# Altium PCB main board_PCB.PcbDoc
Units mm, origin at the board's own origin, x right, y up, seen from the top; angles counter-clockwise.
Board outline 152.4 x 101.6 mm, 2 copper layers (Top Layer, Bottom Layer); 74 components, 62 nets, 278 pads, 63 vias.
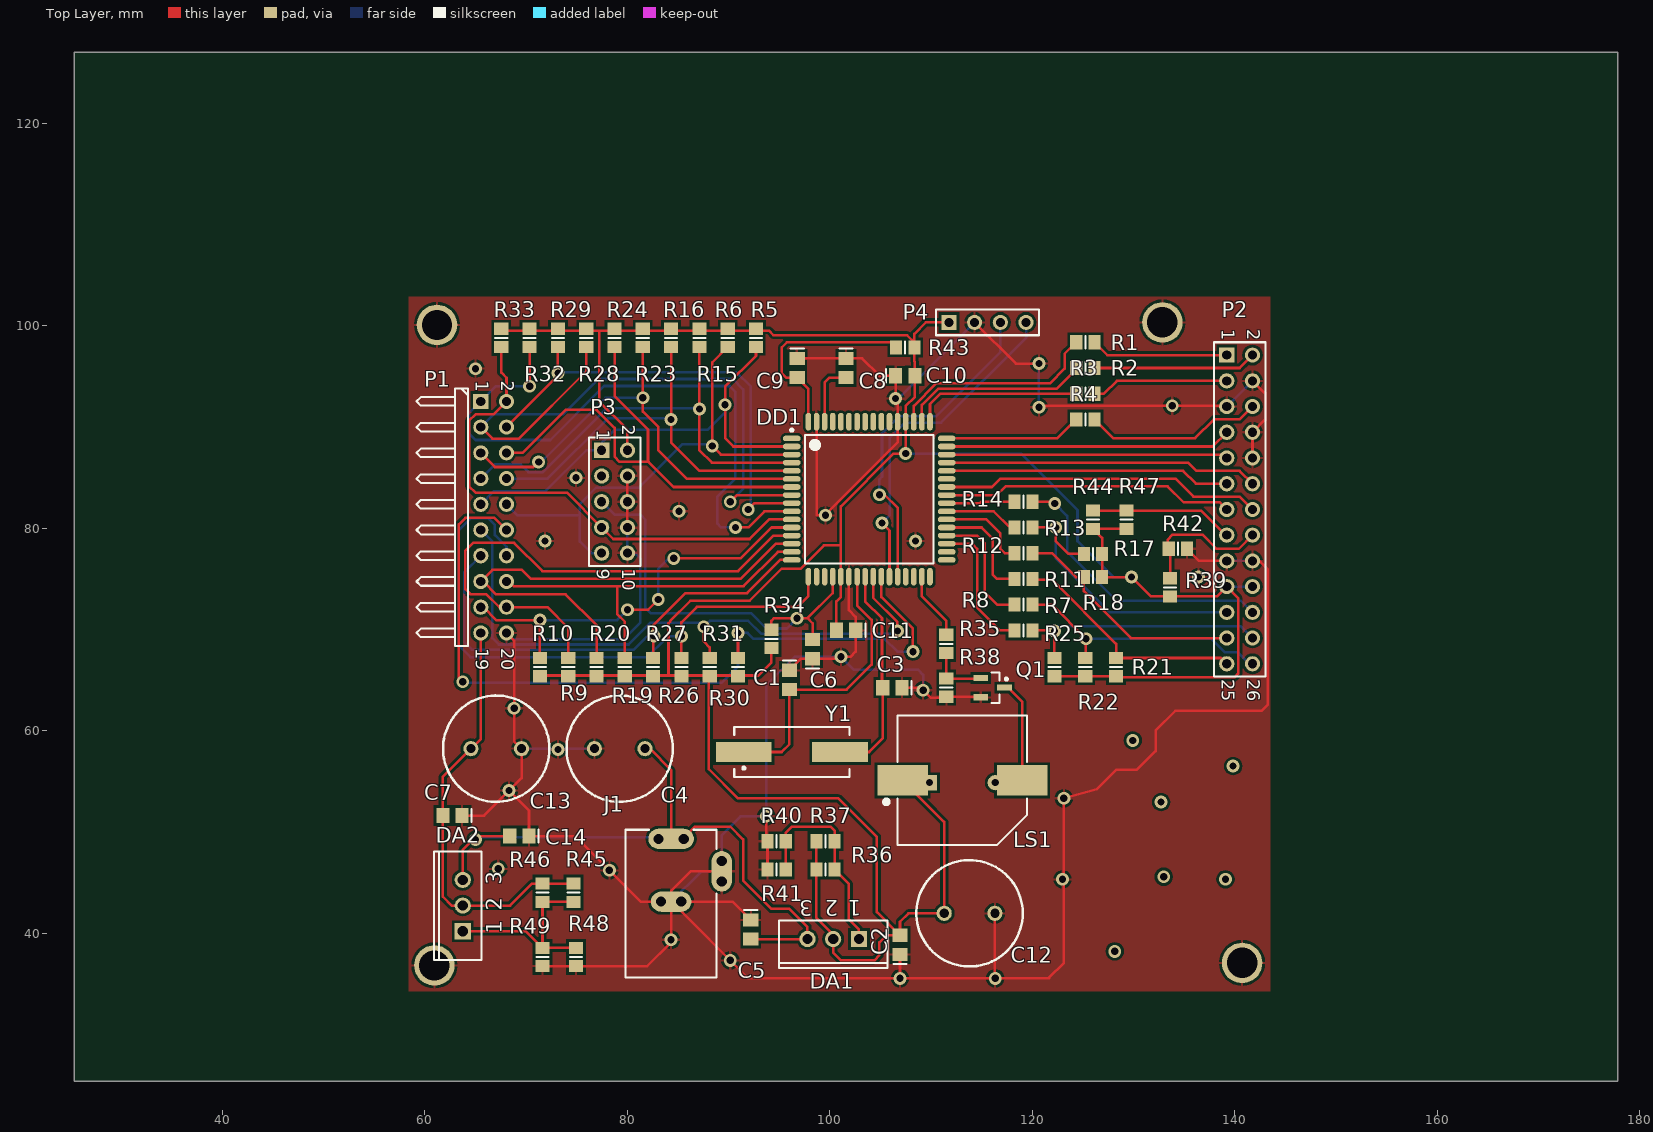
[diagram p0: Top Layer view]
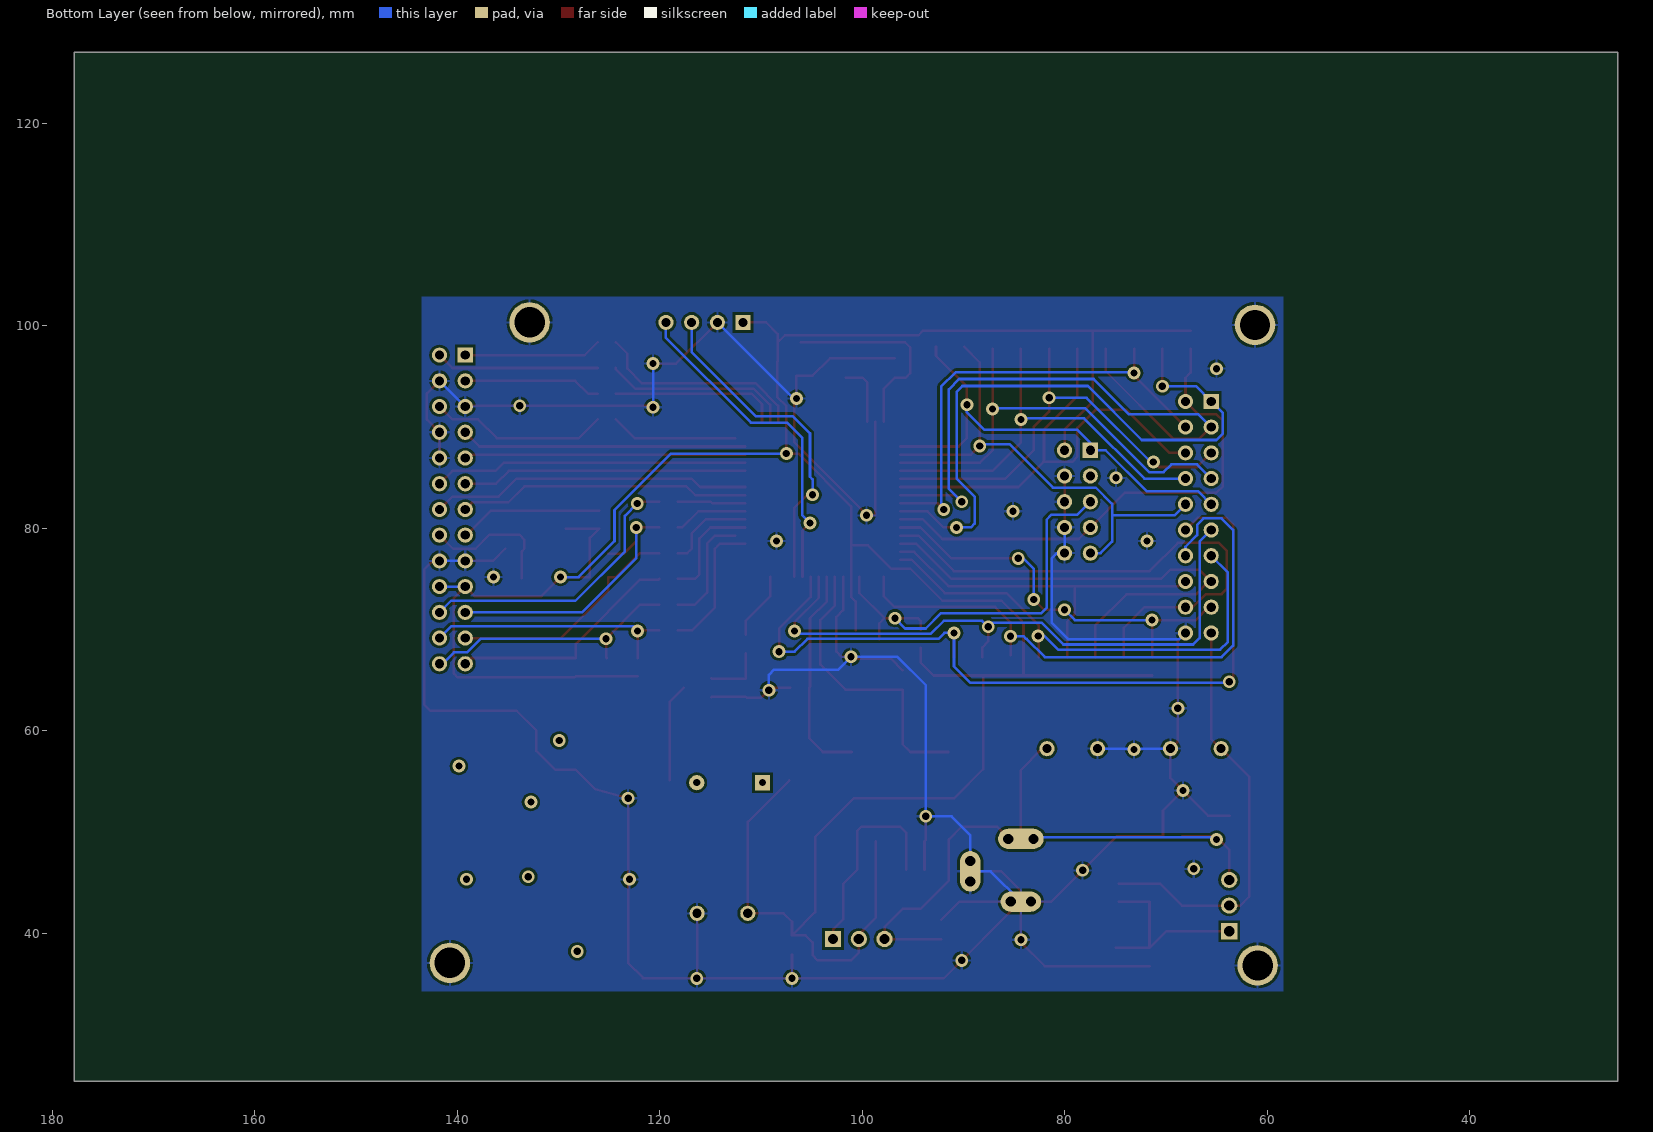
[diagram p1: Bottom Layer view, seen from below]

## Layer stack, top to bottom
Top Layer: signal copper 0.0356
Dielectric: dielectric 0.32, FR-4, Dk 4.8
Bottom Layer: signal copper 0.0356

## Board outline
25.4,25.4 177.8,25.4 177.8,127 25.4,127

## Design rules (kind name [scope] priority, off if disabled: settings)
Clearance [All] p1: gap=0.254
PolygonConnect [All] p1: connectstyle=Relief reliefconductorwidth=0.254 reliefentries=4 polygonreliefangle="90 Angle" airgapwidth=0.254
RoomDefinition "main board_CHM" [InComponentClass('main board_CHM')] p1: confinementstyle=ConfineIn formatcopy=TRUE lockcomponents=FALSE outline 57.15,33.02 144.78,33.02 144.78,104.14 57.15,104.14
RoutingVias [All] p1: holewidth=0.711 width=1.27 viastyle="Through Hole" minholewidth=0.711 minwidth=1.27 maxholewidth=0.711 maxwidth=1.27
SilkscreenOverComponentPads [All] p1: minsilkscreentomaskgap=0.254
SolderMaskExpansion [All] p1: expansion=0.102
Width [All] p1: maxlimit=0.254 minlimit=0.254 preferedwidth=0.254
27 further rules are at their usual default settings.

## Components (designator, comment, footprint, x,y, rotation, side; value= is the part's Value field where it differs from the comment)
C1 "C0805" 0805 98.298,68.072 r90 top
C2 "C0805" 0805 106.934,38.862 r90 top
C3 "C0805" 0805 106.172,64.262 r180 top
C4 "Cap Pol1" RB5-10.5 79.254,58.238 r180 top
C5 "C0805" 0805 92.202,40.386 r270 top
C6 "C0805" 0805 96.012,65.024 r270 top
C7 "C0805" 0805 62.744,51.634 r180 top
C8 "C0805" 0805 101.606,95.83 r270 top
C9 "C0805" 0805 96.78,95.83 r270 top
C10 "C0805" 0805 107.448,95.068 r0 top
C11 "C0805" 0805 101.606,69.922 r180 top
C12 "Cap Pol1" RB5-10.5 113.798,41.982 r0 top
C13 "Cap Pol1" RB5-10.5 67.062,58.238 r0 top
C14 "C0805" 0805 69.348,49.602 r180 top
DA1 "LM317KC" KC03 100.336,39.442 r180 top
DA2 "LM317KC" KC03 63.76,42.744 r90 top
DD1 "ATmega128A-AU" 64A_N 103.892,82.876 r0 top
J1 "PWR2.5" KLD-0202 84.334,35.632 r90 top
LS1 "Buzzer" ABSM-1574 107.188,55.118 r0 top
P1 "Header 10X2H" HDR2X10H 65.538,92.528 r270 top
P2 "Header 13X2" HDR2X13 139.198,97.1 r270 top
P3 "Header 5X2" HDR2X5 77.476,87.702 r270 top
P4 "Header 4" HDR1X4 111.76,100.33 r0 top
Q1 "QNPN" SOT23_M 116.078,64.262 r0 top
R1 "Res2" 6-0805_N 125.228,98.37 r180 top
R2 "Res2" 6-0805_N 125.228,95.83 r180 top
R3 "Res2" 6-0805_N 125.228,93.29 r180 top
R4 "Res2" 6-0805_N 125.228,90.75 r180 top
R5 "Res2" 6-0805_N 92.71,98.806 r90 top
R6 "Res2" 6-0805_N 89.916,98.806 r90 top
R7 "Res2" 6-0805_N 119.132,69.922 r180 top
R8 "Res2" 6-0805_N 119.132,72.462 r180 top
R9 "Res2" 6-0805_N 74.168,66.294 r270 top
R10 "Res2" 6-0805_N 71.374,66.294 r270 top
R11 "Res2" 6-0805_N 119.132,75.002 r180 top
R12 "Res2" 6-0805_N 119.132,77.542 r180 top
R13 "Res2" 6-0805_N 119.132,80.082 r180 top
R14 "Res2" 6-0805_N 119.132,82.622 r180 top
R15 "Res2" 6-0805_N 87.122,98.806 r90 top
R16 "Res2" 6-0805_N 84.328,98.806 r90 top
R17 "Res2" 6-0805_N 125.984,77.47 r0 top
R18 "Res2" 6-0805_N 125.984,75.184 r0 top
R19 "Res2" 6-0805_N 79.756,66.294 r270 top
R20 "Res2" 6-0805_N 76.962,66.294 r270 top
R21 "Res2" 6-0805_N 128.27,66.294 r270 top
R22 "Res2" 6-0805_N 125.222,66.294 r270 top
R23 "Res2" 6-0805_N 81.534,98.806 r90 top
R24 "Res2" 6-0805_N 78.74,98.806 r90 top
R25 "Res2" 6-0805_N 122.174,66.294 r270 top
R26 "Res2" 6-0805_N 85.344,66.294 r270 top
R27 "Res2" 6-0805_N 82.55,66.294 r270 top
R28 "Res2" 6-0805_N 75.946,98.806 r90 top
R29 "Res2" 6-0805_N 73.152,98.806 r90 top
R30 "Res2" 6-0805_N 90.932,66.294 r270 top
R31 "Res2" 6-0805_N 88.138,66.294 r270 top
R32 "Res2" 6-0805_N 70.358,98.806 r90 top
R33 "Res2" 6-0805_N 67.564,98.806 r90 top
R34 "Res2" 6-0805_N 94.234,69.088 r90 top
R35 "Res2" 6-0805_N 111.506,68.58 r270 top
R36 "Res2" 6-0805_N 99.574,46.3 r180 top
R37 "Res2" 6-0805_N 99.574,49.094 r180 top
R38 "Res2" 6-0805_N 111.506,64.262 r90 top
R39 "Res2" 6-0805_N 133.604,74.168 r90 top
R40 "Res2" 6-0805_N 94.748,49.094 r0 top
R41 "Res2" 6-0805_N 94.748,46.3 r0 top
R42 "Res2" 6-0805_N 134.366,77.978 r180 top
R43 "Res2" 6-0805_N 107.448,97.862 r0 top
R44 "Res2" 6-0805_N 125.99,80.844 r90 top
R45 "Res2" 6-0805_N 74.682,44.014 r90 top
R46 "Res2" 6-0805_N 71.634,44.014 r90 top
R47 "Res2" 6-0805_N 129.292,80.844 r90 top
R48 "Res2" 6-0805_N 74.936,37.664 r90 top
R49 "Res2" 6-0805_N 71.634,37.664 r90 top
Y1 "HC49/4H_SMX" HC49/4H_SMX 96.266,57.912 r0 top

## Footprints (in the part's own frame and the unit in brackets; to place one, negate y for a bottom-side part, rotate by r counter-clockwise, add the part's x,y. Pads: shape width x height; smd on the part's side, far side on the other; paste and mask are expansions set on the pad)
6-0805_N [mm] "Chip Resistor, Body 2.0x1.2mm, IPC Medium Density"
  rect 1.2x1.4 smd: 1(-0.9,0) 2(0.9,0)
  silkscreen extent 0,-0.6 0,0.6, body extent -1.07,-0.7 1.07,0.7, height 0.7
64A_N [mm] "Thin QFP, 64-Leads, Body 14x14mm, Pitch 0.8mm, IPC Medium Density"
  oval 1.75x0.55 smd: 1(-7.65,6) 2(-7.65,5.2) 3(-7.65,4.4) 4(-7.65,3.6) 5(-7.65,2.8) 6(-7.65,2) 7(-7.65,1.2) 8(-7.65,0.4) 9(-7.65,-0.4) 10(-7.65,-1.2) 11(-7.65,-2) 12(-7.65,-2.8) 13(-7.65,-3.6) 14(-7.65,-4.4) 15(-7.65,-5.2) 16(-7.65,-6) 33(7.65,-6) 34(7.65,-5.2) 35(7.65,-4.4) 36(7.65,-3.6) 37(7.65,-2.8) 38(7.65,-2) 39(7.65,-1.2) 40(7.65,-0.4) 41(7.65,0.4) 42(7.65,1.2) 43(7.65,2) 44(7.65,2.8) 45(7.65,3.6) 46(7.65,4.4) 47(7.65,5.2) 48(7.65,6)
  oval 0.55x1.75 smd: 17(-6,-7.65) 18(-5.2,-7.65) 19(-4.4,-7.65) 20(-3.6,-7.65) 21(-2.8,-7.65) 22(-2,-7.65) 23(-1.2,-7.65) 24(-0.4,-7.65) 25(0.4,-7.65) 26(1.2,-7.65) 27(2,-7.65) 28(2.8,-7.65) 29(3.6,-7.65) 30(4.4,-7.65) 31(5.2,-7.65) 32(6,-7.65) 49(6,7.65) 50(5.2,7.65) 51(4.4,7.65) 52(3.6,7.65) 53(2.8,7.65) 54(2,7.65) 55(1.2,7.65) 56(0.4,7.65) 57(-0.4,7.65) 58(-1.2,7.65) 59(-2,7.65) 60(-2.8,7.65) 61(-3.6,7.65) 62(-4.4,7.65) 63(-5.2,7.65) 64(-6,7.65)
  silkscreen extent -7.77,-6.35 6.35,6.95, body extent -7,-7 7,7, height 1.2
0805 [mm] "Chip Capacitor; Body 2.0 x 1.2 mm (LxW typ)"
  rect 1.3x1.5 smd: 1(-0.95,0) 2(0.95,0)
  silkscreen extent -1.9,-0.65 -1.9,0.65
ABSM-1574 [mm] "Magnetic Transducer Buzzer"
  rect 5x3 smd: 1(0,0) 2(11.8,0)
  rect 1.5x1.5 hole 0.7: 1A(2.65,-0.24)
  round 1.5 hole 0.7: 2A(9.15,-0.24)
  silkscreen extent -1.83,-6.4 12.3,6.4
HC49/4H_SMX [mm] "Surface Mount Quartz Crystal; Body 13.4 (inc. leads) x 4.9 mm (LxW max)"
  rect 5.5x2 smd: 1(-4.75,0) 2(4.75,0)
  silkscreen extent -5.7,-2.45 5.7,2.45
HDR1X4 [mm] "Connector; Header; 4 Position"
  rect 1.5x1.5 hole 0.9: 1(0,0)
  round 1.5 hole 0.9: 2(2.54,0) 3(5.08,0) 4(7.62,0)
  silkscreen extent -1.27,-1.27 8.89,1.27
HDR2X5 [mm] "Connector; Header; 5x2 Position"
  rect 1.5x1.5 hole 0.9: 1(0,0)
  round 1.5 hole 0.9: 2(0,2.54) 3(2.54,0) 4(2.54,2.54) 5(5.08,0) 6(5.08,2.54) 7(7.62,0) 8(7.62,2.54) 9(10.16,0) 10(10.16,2.54)
  silkscreen extent -1.27,-1.27 11.43,3.81
HDR2X10H [mm] "Connector; Header; 10x2 Position; Right Angle"
  rect 1.5x1.5 hole 0.9: 1(0,0)
  round 1.5 hole 0.9: 2(0,2.54) 3(2.54,0) 4(2.54,2.54) 5(5.08,0) 6(5.08,2.54) 7(7.62,0) 8(7.62,2.54) 9(10.16,0) 10(10.16,2.54) 11(12.7,0) 12(12.7,2.54) 13(15.24,0) 14(15.24,2.54) 15(17.78,0) 16(17.78,2.54) 17(20.32,0) 18(20.32,2.54) 19(22.86,0) 20(22.86,2.54)
  silkscreen extent -1.27,-6.35 24.13,-1.27
HDR2X13 [mm] "Connector; Header; 13x2 Position"
  rect 1.5x1.5 hole 0.9: 1(0,0)
  round 1.5 hole 0.9: 2(0,2.54) 3(2.54,0) 4(2.54,2.54) 5(5.08,0) 6(5.08,2.54) 7(7.62,0) 8(7.62,2.54) 9(10.16,0) 10(10.16,2.54) 11(12.7,0) 12(12.7,2.54) 13(15.24,0) 14(15.24,2.54) 15(17.78,0) 16(17.78,2.54) 17(20.32,0) 18(20.32,2.54) 19(22.86,0) 20(22.86,2.54) 21(25.4,0) 22(25.4,2.54) 23(27.94,0) 24(27.94,2.54) 25(30.48,0) 26(30.48,2.54)
  silkscreen extent -1.27,-1.27 31.75,3.81
KC03 [mm] "TO, Thru-Hole, Vertical, Heatsink Mounted; 3 In-Line Leads; Pitch 2.54 mm"
  rect 1.6x1.6 hole 1: 1(-2.54,0)
  round 1.6 hole 1: 2(0,0) 3(2.54,0)
  silkscreen extent -5.35,-1.85 5.35,2.85
KLD-0202 [mm] "DC Power Jack, 2.5mm, KLD Series, PCB Mount"
  oval 2x4.5 all layers, no hole: 1(13.7,0)
  round 1.5 hole 1: 1A(13.7,-1.25) 1B(13.7,1.25) 2A(7.5,-1) 2B(7.5,1) 3A(9.5,-5) 3B(11.5,-5)
  oval 2x4 all layers, no hole: 2(7.5,0)
  oval 4x2 all layers, no hole: 3(10.5,-5)
  silkscreen extent 0,-4.5 14.6,4.5
RB5-10.5 [mm] "Capacitor (Radial); 2 Leads"
  round 1.5 hole 0.9: 1(-2.5,0) 2(2.5,0)
  silkscreen extent -5.25,-5.25 5.25,5.25
SOT23_M [mm] "SOT23, 3-Leads, Body 2.9x1.3mm, Pitch 0.95mm, Lead Span 2.3mm - Reverse Pinning, IPC Low Density"
  rect 1.45x0.6 smd: 1(1.175,0) 2(-1.175,-0.95) 3(-1.175,0.95)
  silkscreen extent -0.1,-1.5 1.48,1.5, body extent -0.7,-1.5 0.7,1.5, height 1.1

## Part data
C1 C2 C3 C5 C6 C7 C8 C9 C10 C11 C14: "Ceramic Chip Capacitor - Standard"
C4 C12 C13: "Polarized Capacitor (Radial)"
DA1 DA2: "3-Terminal Adjustable Regulator"
DD1: "8-bit AVR Microcontroller, 128KB Flash, 4KB EEPROM, 4KB SRAM, 64-pin TQFP, Industrial Grade (-40°C to 85°C)"
J1: "Low Voltage Power Supply Connector"
LS1: "Magnetic Transducer Buzzer"
P1: "Header, 10-Pin, Dual row, Right Angle"
P2: "Header, 13-Pin, Dual row"
P3: "Header, 5-Pin, Dual row"
P4: "Header, 4-Pin"
Q1: "NPN Bipolar Transistor"
R1 R2 R3 R4 R5 R6 R7 R8 R9 R10 R11 R12 R13 R14 R15 R16 R17 R18 R19 R20 R21 R22 R23 R24 R25 R26 R27 R28 R29 R30 R31 R32 R33 R34 R35 R36 R37 R38 R39 R40 R41 R42 R43 R44 R45 R46 R47 R48 R49: "Resistor"
Y1: "Surface Mount Quartz Crystal"

## Free pads (board coordinates)
  round 4 hole 3: 0(60.96,36.83) 0(61.214,100.076) 0(132.842,100.33) 0(140.716,37.084)

## Via types
v1: diameter 1.27, hole 0.711, Top Layer to Bottom Layer, 63 vias

## Nets (pads, with @x,y where several pads share a name; then routed paths per layer and width w, separated by ;. In a path a pad name is that pad's centre, name@x,y a point inside that pad or via, vN(x,y) a via of type N, cw(c..) or ccw(c..) an arc to the next point about the centre after c; other vN are vias at no path point)
AREF: C8.2 DD1.62 | length 6.2
  Top Layer w0.254: DD1.62 99.492,94.412 99.96,94.88 C8.2
AVCC: C9.2 DD1.64 R43.1 | length 20.1
  Top Layer w0.254: DD1.64 97.892,93.768 C9.2 95.698,94.88 95.256,95.322 95.256,97.862 95.764,98.37 R43.1@106.04,98.37
B_LIG: P2.15 R44.2 R47.2 | length 14.2
  Top Layer w0.254: R44.2 R47.2 136.652,81.744 139.076,79.32 P2.15
BEEP_ON: DD1.31 R35.1 | length 6.7
  Top Layer w0.254: DD1.31 109.092,73.28 111.506,70.866 R35.1
BUT1: P2.21 R13.1 R17.1 | length 29
  Top Layer w0.254: R13.1 v1(122.307,80.082) 122.307,78.74 123.577,77.47 R17.1
  Bottom Layer w0.254: v1(122.307,80.082) 122.307,77.083 127.69,71.7 P2.21
BUT2: P2.23 R12.1 R18.1 | length 23.4
  Top Layer w0.254: R12.1 121.932,77.542 124.29,75.184 R18.1 125.084,73.798 129.722,69.16 P2.23
BUT3: P2.25 R11.1 R21.1 | length 23.5
  Top Layer w0.254: R11.1 120.104,74.93 121.926,74.93 128.27,68.586 R21.1 138.624,67.194 P2.25
BUT4: P2.26 R8.1 R22.1 | length 26
  Top Layer w0.254: R8.1 121.92,72.462 v1(125.294,69.088) 125.294,67.266 R22.1
  Bottom Layer w0.254: v1(125.294,69.088) 137.671,69.088 139.008,67.751 140.329,67.751 141.46,66.62 P2.26
BUT5: P2.24 R7.1 R25.1 | length 25.1
  Top Layer w0.254: R7.1 122.102,69.922 v1(122.174,69.85) R25.1
  Bottom Layer w0.254: v1(122.174,69.85) 122.652,70.328 140.57,70.328 P2.24
CONTR: P2.16 R39.2 R42.2 | length 13.7
  Top Layer w0.254: R39.2 133.604,77.724 133.35,77.978 133.35,78.856 133.858,79.364 136.79,79.364 138.176,77.978 140.396,77.978 P2.16
  Bottom Layer w0.254: P2.16@141.738,79.254 P2.16
D4: DD1.41 P2.13 | length 29
  Top Layer w0.254: DD1.41 116.484,83.276 117.354,84.146 133.356,84.146 134.952,82.55 138.508,82.55 P2.13
D5: DD1.42 P2.14 | length 31.8
  Top Layer w0.254: DD1.42 116.014,84.076 116.846,84.908 134.118,84.908 135.896,83.13 140.468,83.13 P2.14
D6: DD1.44 P2.11 | length 28.2
  Top Layer w0.254: DD1.44 134.874,85.676 136.15,84.4 P2.11
D7: DD1.45 P2.12 | length 31.1
  Top Layer w0.254: DD1.45 135.388,86.476 136.194,85.67 140.468,85.67 P2.12
E: DD1.47 P2.7 | length 28.2
  Top Layer w0.254: DD1.47 137.794,88.076 P2.7
GND: C1.1 C2.1 C3.1 C4.2 C5.1 C6.1 C7.1 C8.1 C9.1 C10.1 C11.1 C12.2 C13.2 C14.1 DD1.22 DD1.53 DD1.63 J1.2 J1.2A J1.2B J1.3 J1.3A J1.3B P1.20 P2.4 P2.5 P2.8 P2.10 P2.17 P2.18 P3.4 P3.6 P3.8 P3.10 P4.2 pad.0 Q1.2 R38.1 R40.1 R41.1 R42.1 R48.1 R49.1 | length 399.1
  Top Layer w0.254: C7.1 65.858,51.634 v1(68.326,54.102) ; P1.20 68.84,68.906 68.84,58.96 C13.2 69.562,55.338 v1(68.326,54.102) ; R49.1 R48.1 81.976,36.764 84.328,39.116 v1(84.328,39.37) J1.2@84.328,43.126 ; P3.8 P3.6 P3.4 ; J1.2B 81.328,43.132 74.858,49.602 C14.1 70.298,52.13 v1(68.326,54.102) ; J1.2 84.376,43.132 J1.2@84.382,43.126 ; J1.3A J1.3 ; J1.3B J1.3 ; C5.1 90.412,43.126 J1.2@84.382,43.126 ; v1(93.726,51.562) 93.726,49.216 R40.1 R41.1 ; C6.1 97.16,67.122 C1.1 100.904,67.122 v1(101.092,67.31) 102.048,67.31 102.556,67.818 C11.1 102.556,71.258 101.892,71.922 DD1.22 ; C9.1 C8.1 103.181,96.78 104.893,95.068 C10.1 v1@106.498,92.874 ; DD1.63 98.692,81.28 v1(99.568,81.28) 99.568,81.367 106.692,88.491 DD1.53 106.692,92.68 v1@106.498,92.874 ; v1(106.483,92.807) 106.498,92.823 v1@106.498,92.874 ; C2.1 v1(106.934,35.56) ; C3.1 108.966,64.262 v1(109.22,64.008) 109.982,63.246 111.39,63.246 R38.1 114.853,63.362 Q1.2 ; P4.2 118.364,96.266 v1(120.65,96.266) ; C12.2 116.298,35.594 v1(116.332,35.56) ; v1(120.65,91.948) 120.799,92.097 v1(133.812,92.097) 139.121,92.097 P2.5 ; R42.1 136.464,76.78 P2.17 ; P2.18 142.422,76.78 143.256,75.946 143.256,62.622 142.61,61.976 134.112,61.976 132.173,60.037 132.173,58.005 130.327,56.159 128.295,56.159 126.356,54.22 v1(123.11,53.34) 123.11,37.084 121.666,35.64 121.666,35.56 v1(116.332,35.56) ; P2.10 P2.8 142.983,90.725 142.983,93.315 P2.4 ; J1.2@84.328,43.126 84.328,44.196 86.264,46.132 J1.3 ; J1.2@84.328,43.126 J1.2@84.382,43.126 ; J1.2@84.382,43.126 91.948,35.56 v1(106.934,35.56) ; v1(106.934,35.56) v1(116.332,35.56)
  Bottom Layer w0.254: P1.20 68.713,69.033 79.635,69.033 81.286,70.684 81.286,77.034 80.778,77.542 P3.10 P3.8 ; C13.2 C4.2 ; J1.2B J1.2 87.334,46.132 J1.3 ; J1.3A J1.3 ; v1(106.483,92.807) 106.777,92.807 P4.2 ; v1(109.22,64.008) 109.22,65.532 108.712,66.04 102.362,66.04 v1(101.092,67.31) 96.52,67.31 93.726,64.516 v1(93.726,51.562) 91.186,51.562 89.334,49.71 J1.3B J1.3 ; v1(120.65,91.948) v1(120.65,96.266) ; P2.17 P2.18 ; P2.5 P2.4
  other v1: 90.17,37.338 122.983,45.339 78.232,46.228 67.264,46.377 73.152,58.166 68.834,62.23 136.398,75.184 71.882,78.74 108.458,78.74 85.096,81.682 74.936,84.984 65.024,95.758
LD1: P2.22 R14.1 | length 28.3
  Top Layer w0.254: R14.1 122.053,82.622 v1(122.216,82.459)
  Bottom Layer w0.254: v1(122.216,82.459) 123.444,81.231 123.444,77.724 128.325,72.843 140.595,72.843 P2.22
LD2: P2.6 R4.1 | length 17.7
  Top Layer w0.254: R4.1 127.978,88.9 136.072,88.9 137.922,90.75 140.468,90.75 P2.6
LD3: P2.3 R3.1 | length 13.6
  Top Layer w0.254: R3.1 127.072,93.29 128.342,94.56 P2.3
LD4: P2.2 R2.1 | length 16.1
  Top Layer w0.254: R2.1 140.468,95.83 P2.2
LD5: P2.1 R1.1 | length 13.6
  Top Layer w0.254: R1.1 127.398,97.1 P2.1
NetC4_1: C4.1 C5.2 C14.2 DA1.3 DA2.3 J1.1 J1.1A J1.1B | length 65.1
  Top Layer w0.254: DA2.3 63.76,48.266 64.77,49.276 v1(65.024,49.276) 65.35,49.602 C14.2 ; C4.1 82.224,58.238 84.334,56.128 J1.1 ; J1.1A 85.584,49.45 86.68,50.546 90.17,50.546 91.44,49.276 91.44,45.212 94.234,42.418 96.012,42.418 97.79,40.64 97.79,39.436 C5.2
  Bottom Layer w0.254: v1@65.024,49.497 82.919,49.497 J1.1B J1.1 J1.1A
NetDA1_1: DA1.1 R36.1 R37.1 R40.2 R41.2 | length 20.6
  Top Layer w0.254: R41.2 R40.2 95.648,49.928 96.266,50.546 100.076,50.546 100.474,50.148 R37.1 R36.1 101.854,44.92 101.854,41.402 102.876,40.38 DA1.1
NetDA2_1: DA2.1 R45.1 R46.1 R48.2 R49.2 | length 19.5
  Top Layer w0.254: DA2.1 69.994,40.204 R49.2 ; R45.1 R46.1 R49.2 ; R48.2 R49.2
NetDD1_35: DD1.35 R7.2 | length 13.6
  Top Layer w0.254: DD1.35 114.056,78.476 114.554,77.978 114.554,72.189 116.821,69.922 R7.2
NetDD1_36: DD1.36 R8.2 | length 11.4
  Top Layer w0.254: 112.522,79.276 114.526,79.276 115.316,78.486 115.316,73.66 116.514,72.462 R8.2
NetDD1_37: DD1.37 R11.2 | length 10.9
  Top Layer w0.254: DD1.37 114.996,80.076 116.078,78.994 116.078,75.438 116.514,75.002 R11.2
NetDD1_38: DD1.38 R12.2 | length 9
  Top Layer w0.254: DD1.38 115.466,80.876 116.849,79.493 116.849,77.969 117.276,77.542 R12.2
NetDD1_39: DD1.39 R13.2 | length 7.4
  Top Layer w0.254: DD1.39 116.19,81.676 117.784,80.082 R13.2
NetDD1_40: DD1.40 R14.2 | length 6.8
  Top Layer w0.254: DD1.40 114.814,82.476 114.96,82.622 R14.2
NetDD1_48: DD1.48 R4.2 | length 12.6
  Top Layer w0.254: 112.522,88.876 122.454,88.876 R4.2
NetDD1_49: DD1.49 R3.2 | length 16.6
  Top Layer w0.254: DD1.49 109.892,92.259 110.923,93.29 R3.2
NetDD1_50: DD1.50 R2.2 | length 18.5
  Top Layer w0.254: DD1.50 109.092,92.178 110.712,93.798 122.428,93.798 124.328,95.698 R2.2
NetDD1_51: DD1.51 R1.2 | length 21.1
  Top Layer w0.254: DD1.51 108.292,92.096 110.502,94.306 121.738,94.306 123.19,95.758 123.19,97.232 R1.2
NetLS1_2: LS1.2 LS1.2A Q1.1 | length 9.7
  Top Layer w0.254: Q1.1@117.602,64.262 118.988,62.876 LS1.2
NetQ1_2: Q1.3 R35.2 R38.2 | length 5.9
  Top Layer w0.254: R35.2 R38.2 114.853,65.162 Q1.3
PDI: DD1.2 P1.9 P3.1 R5.1 | length 46.2
  Top Layer w0.254: R5.1 92.71,97.028 89.662,93.98 v1(89.662,92.202) 89.662,88.9 90.486,88.076 DD1.2
  Bottom Layer w0.254: P1.9 66.808,83.638 71.888,83.638 75.952,87.702 P3.1 77.476,88.398 78.812,89.734 87.956,89.734 89.662,91.44 v1(89.662,92.202)
PDO: DD1.3 P1.10 P3.9 R6.1 | length 48.2
  Top Layer w0.254: R6.1 88.392,96.382 v1(88.392,88.138) 89.254,87.276 DD1.3
  Bottom Layer w0.254: P1.10 69.166,81.28 75.317,81.28 ; P3.9 76.46,77.542 75.317,78.685 75.317,81.28 ; v1(88.392,88.138) 88.244,88.286 85.426,88.286 81.159,84.019 76.94,84.019 75.317,82.395 75.317,81.28
RES: C1.2 DD1.20 P3.5 R34.2 | length 42
  Top Layer w0.254: R34.2 94.234,70.866 94.488,71.12 v1(96.774,71.12) 97.8,71.12 ; C1.2 98.298,70.622 97.8,71.12 ; DD1.20 100.292,73.612 97.8,71.12
  Bottom Layer w0.254: P3.5 78.746,81.352 81.286,81.352 81.794,80.844 81.794,72.136 82.302,71.628 92.202,71.628 93.726,70.104 95.758,70.104 v1(96.774,71.12)
RS: DD1.46 P2.9 | length 27.8
  Top Layer w0.254: DD1.46 138.862,87.276 P2.9
RXD1: DD1.27 P4.4 | length 33.4
  Top Layer w0.254: v1(105.156,80.518) 105.892,79.782 DD1.27
  Bottom Layer w0.254: v1(105.156,80.518) 105.918,81.28 105.918,88.9 107.442,90.424 110.998,90.424 119.38,98.806 P4.4
SCK: DD1.11 P1.2 P3.7 R33.1 | length 51.2
  Top Layer w0.254: R33.1@67.57,97.724 67.57,95.373 68.078,94.865 P1.2 66.808,91.258 65.03,91.258 64.395,90.623 64.395,84.146 65.03,83.511 74.047,83.511 P3.7 78.619,78.939 92.081,78.939 94.018,80.876 DD1.11
SENS_3: DD1.4 P1.7 R15.1 | length 44.7
  Top Layer w0.254: R15.1@87.128,97.724 v1(87.128,91.766) 87.128,87.702 88.354,86.476 DD1.4
  Bottom Layer w0.254: P1.7 66.935,86.305 69.463,86.305 70.23,85.538 71.634,85.538 71.639,85.543 71.674,85.543 77.998,91.868 v1@87.026,91.868
SENS_4: DD1.5 P1.8 R16.1 | length 40.9
  Top Layer w0.254: R16.1@84.334,97.724 v1(84.334,90.75) 84.334,88.47 87.128,85.676 DD1.5
  Bottom Layer w0.254: P1.8 72.142,84.908 78.086,90.852 v1@84.232,90.852
SENS_5: DD1.6 P1.5 R23.1 | length 44.4
  Top Layer w0.254: P1.5 66.935,86.051 70.745,86.051 v1(71.253,86.559) ; R23.1@81.54,97.724 v1(81.54,92.884) 81.54,91.512 83.064,89.988 83.064,87.702 85.89,84.876 DD1.6
  Bottom Layer w0.254: v1(71.253,86.559) 71.507,86.559 77.832,92.884 v1(81.54,92.884)
SENS_6: DD1.7 P1.6 R24.1 | length 47.3
  Top Layer w0.254: P1.6 69.668,87.448 73.914,91.694 76.962,91.694 78.746,89.91 78.746,87.067 79.254,86.559 82.048,86.559 ; R24.1@78.746,97.724 78.746,93.048 82.048,89.746 82.048,86.559 ; DD1.7 84.588,84.076 82.105,86.559 82.048,86.559
SENS_7: DD1.8 P1.3 R28.1 | length 62.1
  Top Layer w0.254: P1.3 66.681,88.845 69.293,88.845 75.952,95.504 R28.1@75.952,97.724 ; v1(90.176,82.622) 90.83,83.276 DD1.8
  Bottom Layer w0.254: P1.3 66.808,91.258 73.666,91.258 77.15,94.742 90.424,94.742 91.44,93.726 91.44,83.886 v1(90.176,82.622)
SENS_8: DD1.9 P1.4 R29.1 | length 46.3
  Top Layer w0.254: P1.4 73.158,95.068 v1(73.158,95.347) R29.1@73.158,97.724 ; v1(91.954,81.86) 92.57,82.476 DD1.9
  Bottom Layer w0.254: v1(73.158,95.347) 73.209,95.398 90.784,95.398 92.202,93.98 92.202,82.108 v1(91.954,81.86)
SENS_9: DD1.10 P1.1 R32.1 | length 63.7
  Top Layer w0.254: v1(70.364,94.027) R32.1@70.364,97.724 ; v1(90.684,80.082) 91.954,80.082 93.548,81.676 DD1.10
  Bottom Layer w0.254: v1(70.364,94.027) 67.037,94.027 P1.1 64.395,91.385 64.395,89.353 65.03,88.718 72.396,88.718 77.724,94.046 90.104,94.046 90.678,93.472 90.678,84.902 88.9,83.124 88.9,80.462 89.28,80.082 v1(90.684,80.082)
SENS_11: DD1.12 P1.17 R10.1 | length 40.5
  Top Layer w0.254: P1.17 65.792,72.208 67.062,70.938 v1(71.38,70.938) R10.1@71.38,67.266 ; v1(80.016,71.954) 82.048,71.954 v1(83.064,72.97) ; v1(84.588,77.034) 91.204,77.034 94.246,80.076 DD1.12
  Bottom Layer w0.254: v1(71.38,70.938) 79,70.938 v1(80.016,71.954) ; v1(83.064,72.97) 83.064,76.018 84.08,77.034 v1(84.588,77.034)
SENS_12: DD1.13 P1.18 R9.1 | length 53.6
  Top Layer w0.254: R9.1@74.174,67.266 74.174,70.176 72.142,72.208 P1.18 67.36,72.208 66.068,73.5 64.5,73.5 64.014,73.986 64.014,77.796 64.776,78.558 68.84,78.558 71.634,75.764 90.938,75.764 94.45,79.276 DD1.13
SENS_13: DD1.14 P1.15 R20.1 | length 49.4
  Top Layer w0.254: R20.1@76.968,67.266 76.968,70.43 73.92,73.478 67.062,73.478 65.792,74.748 P1.15 66.681,75.891 69.602,75.891 70.491,75.002 91.192,75.002 94.666,78.476 DD1.14
SENS_14: DD1.15 P1.16 R19.1 | length 36.8
  Top Layer w0.254: P1.16@68.332,74.748 68.789,74.291 79,74.291 ; R19.1@79.762,67.266 79.762,70.771 79,71.533 79,74.291 ; DD1.15 94.882,77.676 91.497,74.291 79,74.291
SENS_15: DD1.16 P1.13 R27.1 | length 47.7
  Top Layer w0.254: R27.1@82.556,67.266 82.556,70.392 85.769,73.605 91.827,73.605 95.098,76.876 DD1.16
  Bottom Layer w0.254: P1.13 63.899,75.649 63.899,68.767 64.649,68.017 80.651,68.017 v1@82.012,69.378
  other v1: 82.625,69.378
SENS_16: DD1.17 P1.14 R26.1 | length 61.3
  Top Layer w0.254: R26.1@85.344,67.448 v1(85.344,69.342) 85.35,69.348 85.35,70.709 86.874,72.233 96.805,72.233 97.892,73.32 DD1.17
  Bottom Layer w0.254: P1.14 68.078,78.177 66.935,79.32 66.935,80.336 66.3,80.971 64.522,80.971 63.379,79.828 63.379,68.423 64.522,67.28 81.964,67.28 83.772,69.088 83.82,69.088 84.074,69.342 v1(85.344,69.342)
SENS_17: DD1.25 P1.11 R31.1 | length 63
  Top Layer w0.254: v1(87.56,70.278) 87.56,68.83 88.144,68.246 R31.1@88.144,67.266 ; DD1.25 104.292,73.129 106.68,70.741 v1(106.68,69.85)
  Bottom Layer w0.254: P1.11 66.681,78.685 66.681,69.16 67.316,68.525 80.143,68.525 82.302,70.684 87.153,70.684 v1(87.56,70.278) 88.148,70.866 91.948,70.866 93.218,69.596 106.426,69.596 v1(106.68,69.85)
SENS_18: DD1.26 P1.12 R30.1 | length 81.5
  Top Layer w0.254: v1(63.76,64.842) 63.379,65.223 63.379,80.387 64.014,81.022 66.884,81.022 P1.12 ; R30.1@90.938,67.266 v1(90.938,69.668) ; DD1.26 105.092,73.216 108.204,70.104 v1(108.204,67.818)
  Bottom Layer w0.254: v1(63.76,64.842) 63.836,64.766 89.338,64.766 90.938,66.366 v1(90.938,69.668) 91.876,69.668 92.456,69.088 105.41,69.088 106.68,67.818 v1(108.204,67.818)
TXD1: DD1.28 P4.3 | length 33.2
  Top Layer w0.254: v1(104.902,83.312) 105.41,83.312 106.692,82.03 DD1.28
  Bottom Layer w0.254: v1(104.902,83.312) 104.902,84.836 105.156,85.09 105.156,89.367 106.841,91.052 110.49,91.052 116.84,97.402 P4.3
VCC: C2.2 C10.2 C11.2 C12.1 DA1.2 DD1.21 DD1.52 LS1.1 LS1.1A P2.19 P2.20 P3.2 P4.1 R5.2 R6.2 R9.2 R10.2 R15.2 R16.2 R17.2 R18.2 R19.2 R20.2 R21.2 R22.2 R23.2 R24.2 R25.2 R26.2 R27.2 R28.2 R29.2 R30.2 R31.2 R32.2 R33.2 R34.1 R36.2 R37.2 R39.1 R43.2 R44.1 R47.1 | length 303.1
  Top Layer w0.254: R33.2@67.57,99.524 77.222,99.524 ; R10.2@71.38,65.466 84.074,65.466 ; P3.2 80.016,89.734 77.222,92.528 77.222,99.524 ; R31.2@88.144,65.466 92.945,65.466 94.234,66.755 R34.1 ; R37.2 R36.2 98.674,41.534 100.336,39.872 DA1.2 DA1.2@100.336,39.34 ; DA1.2@100.284,39.393 100.285,39.391 DA1.2@100.336,39.34 ; C11.2 100.656,72.788 101.092,73.224 DD1.21 101.092,78.304 ; LS1.1 111.298,51.008 C12.1 107.768,41.982 106.934,41.148 C2.2 ; P4.1 109.474,100.33 108.348,99.204 R43.2@108.348,98.343 ; R25.2 R22.2 R21.2 128.386,65.278 139.954,65.278 140.329,65.653 140.329,73.109 P2.19 138.226,73.268 R39.1 131.71,73.268 v1(129.794,75.184) R18.2 R17.2 126.884,79.05 R44.1 R47.1 ; 77.222,99.524 92.716,99.524 93.98,99.524 94.444,99.06 107.631,99.06 R43.2@108.348,98.343 ; 84.074,65.466 84.074,70.612 84.232,70.77 84.232,70.836 86.239,72.843 92.081,72.843 95.256,76.018 97.136,76.018 99.422,78.304 101.092,78.304 ; 84.074,65.466 88.066,65.466 88.066,56.206 90.932,53.34 100.838,53.34 104.648,49.53 104.648,42.098 C2.2 ; DA1.2@100.336,39.34 100.336,38.094 101.092,37.338 104.394,37.338 104.902,37.846 104.902,39.116 105.598,39.812 C2.2 ; 101.092,78.304 101.092,82.173 106.295,87.376 v1(107.492,87.376) DD1.52 107.492,92.071 108.398,92.977 C10.2 108.398,96.44 108.348,96.49 R43.2 R43.2@108.348,98.343
  Bottom Layer w0.254: v1(107.492,87.376) 118.872,87.376 124.46,81.788 124.46,78.74 128.016,75.184 v1(129.794,75.184) ; P2.19 P2.20
VCC_2: C7.2 C13.1 DA2.2 P1.19 R45.2 R46.2 | length 41.8
  Top Layer w0.254: P1.19 65.538,59.214 C13.1 61.794,55.47 C7.2 61.794,43.616 62.666,42.744 DA2.2 68.434,42.744 70.604,44.914 R46.2 R45.2
XTL1: C3.2 DD1.24 Y1.2 | length 21.4
  Top Layer w0.254: Y1.2 103.886,57.912 105.222,59.248 C3.2 ; DD1.24 103.492,72.784 105.156,71.12 C3.2@105.156,64.328
XTL2: C6.2 DD1.23 Y1.1 | length 28.6
  Top Layer w0.254: Y1.1 95.25,57.912 96.012,58.674 C6.2 101.666,64.074 104.14,66.548 104.14,70.944 102.692,72.392 DD1.23
pads on no net: DD1.1 DD1.18 DD1.19 DD1.29 DD1.30 DD1.32 DD1.33 DD1.34 DD1.43 DD1.54 DD1.55 DD1.56 DD1.57 DD1.58 DD1.59 DD1.60 DD1.61 P3.3
copper on no net:
  other v1: 128.143,38.227 139.065,45.339 132.969,45.593 132.715,52.959 139.827,56.515 129.921,59.055

## Polygon pours and split planes (outlines as drawn)
GND on Bottom Layer "Top Layer-No Net" (solid, remove dead copper, pour order 2): 58.42,102.87 58.42,34.29 143.51,34.29 143.51,102.87
GND on Top Layer "Top Layer-No Net" (solid, remove dead copper, pour order 4): 58.42,34.29 143.51,34.29 143.51,102.87 58.42,102.87

## Other copper
Top Layer:
  pour cut-out: 112.05,88.749 112.05,76.749 110.322,76.749 110.236,76.835 110.236,88.773

## Text inside footprints (layer, text, board x,y; h text height)
DA1: Top Overlay "2" at 100.836,43.267 h1.5 r180; Top Overlay "1" at 103.126,43.267 h1.5 r180; Top Overlay "3" at 98.296,43.267 h1.5 r180
DA2: Top Overlay "2" at 67.585,42.244 h1.5 r90; Top Overlay "1" at 67.585,39.954 h1.5 r90; Top Overlay "3" at 67.585,44.784 h1.5 r90
J1: Mechanical 1 "Mech 2 - Clearance, move to internal plane if present" at 79.268,35.918 h0.3 r90; Mechanical 1 "Mech 1 - Slot cut-out" at 78.768,35.918 h0.3 r90; Mechanical 1 "Assign keep-out area to slot" at 77.768,35.918 h0.3 r90; Mechanical 1 "Alert PCB fab to slot details" at 78.268,35.918 h0.3 r90
P1: Top Overlay "1" at 65.03,94.56 h1.27 r270; Top Overlay "2" at 67.57,94.56 h1.27 r270; Top Overlay "19" at 65.03,68.144 h1.27 r270; Top Overlay "20" at 67.57,68.144 h1.27 r270
P2: Top Overlay "2" at 141.23,99.64 h1.27 r270; Top Overlay "1" at 138.69,99.64 h1.27 r270; Top Overlay "25" at 138.69,65.096 h1.27 r270; Top Overlay "26" at 141.23,65.096 h1.27 r270
P3: Top Overlay "10" at 79.508,76.018 h1.27 r270; Top Overlay "9" at 76.968,76.018 h1.27 r270; Top Overlay "1" at 76.968,89.734 h1.27 r270; Top Overlay "2" at 79.508,90.242 h1.27 r270